# Altium PCB ST-Link V2 Dongle.PcbDoc
Units mm, origin at the board's own origin, x right, y up, seen from the top; angles counter-clockwise.
Board outline 29 x 35 mm, 2 copper layers (Top Layer, Bottom Layer); 3 components, 8 nets, 37 pads, 87 vias.
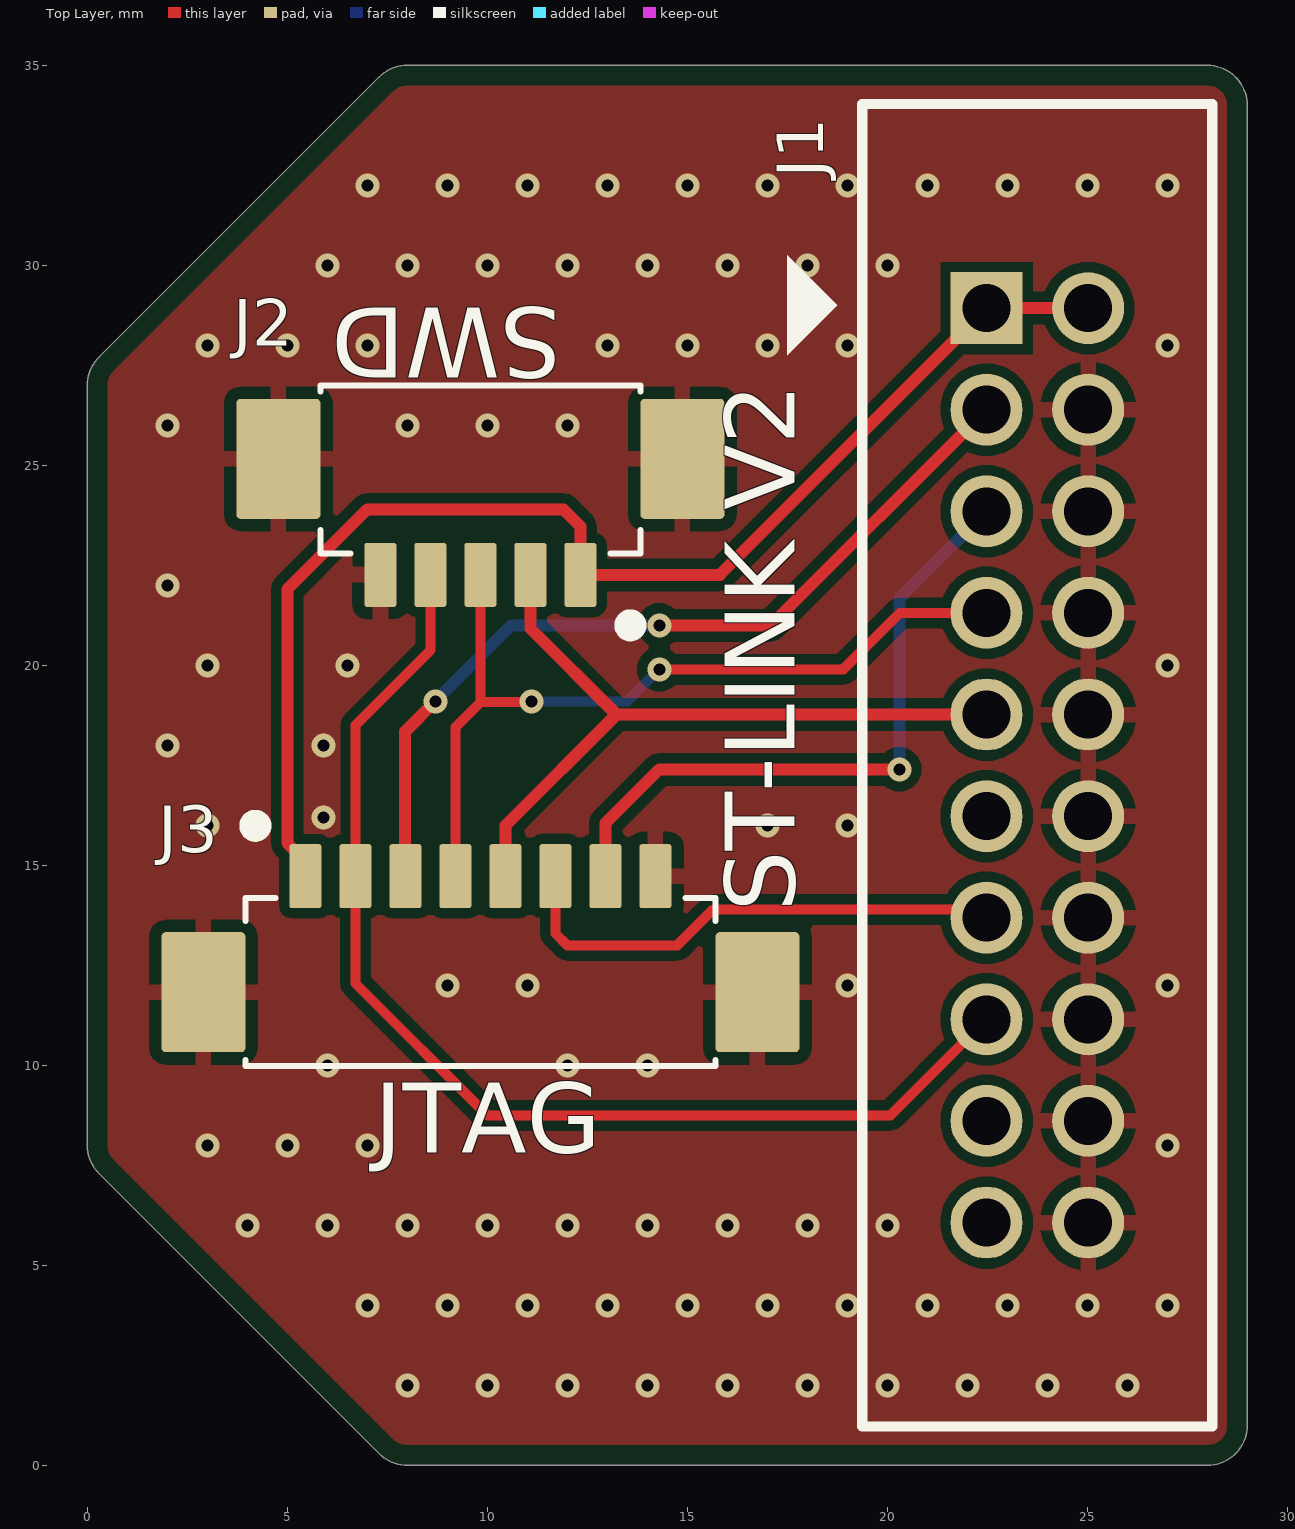
[diagram p0: Top Layer view]
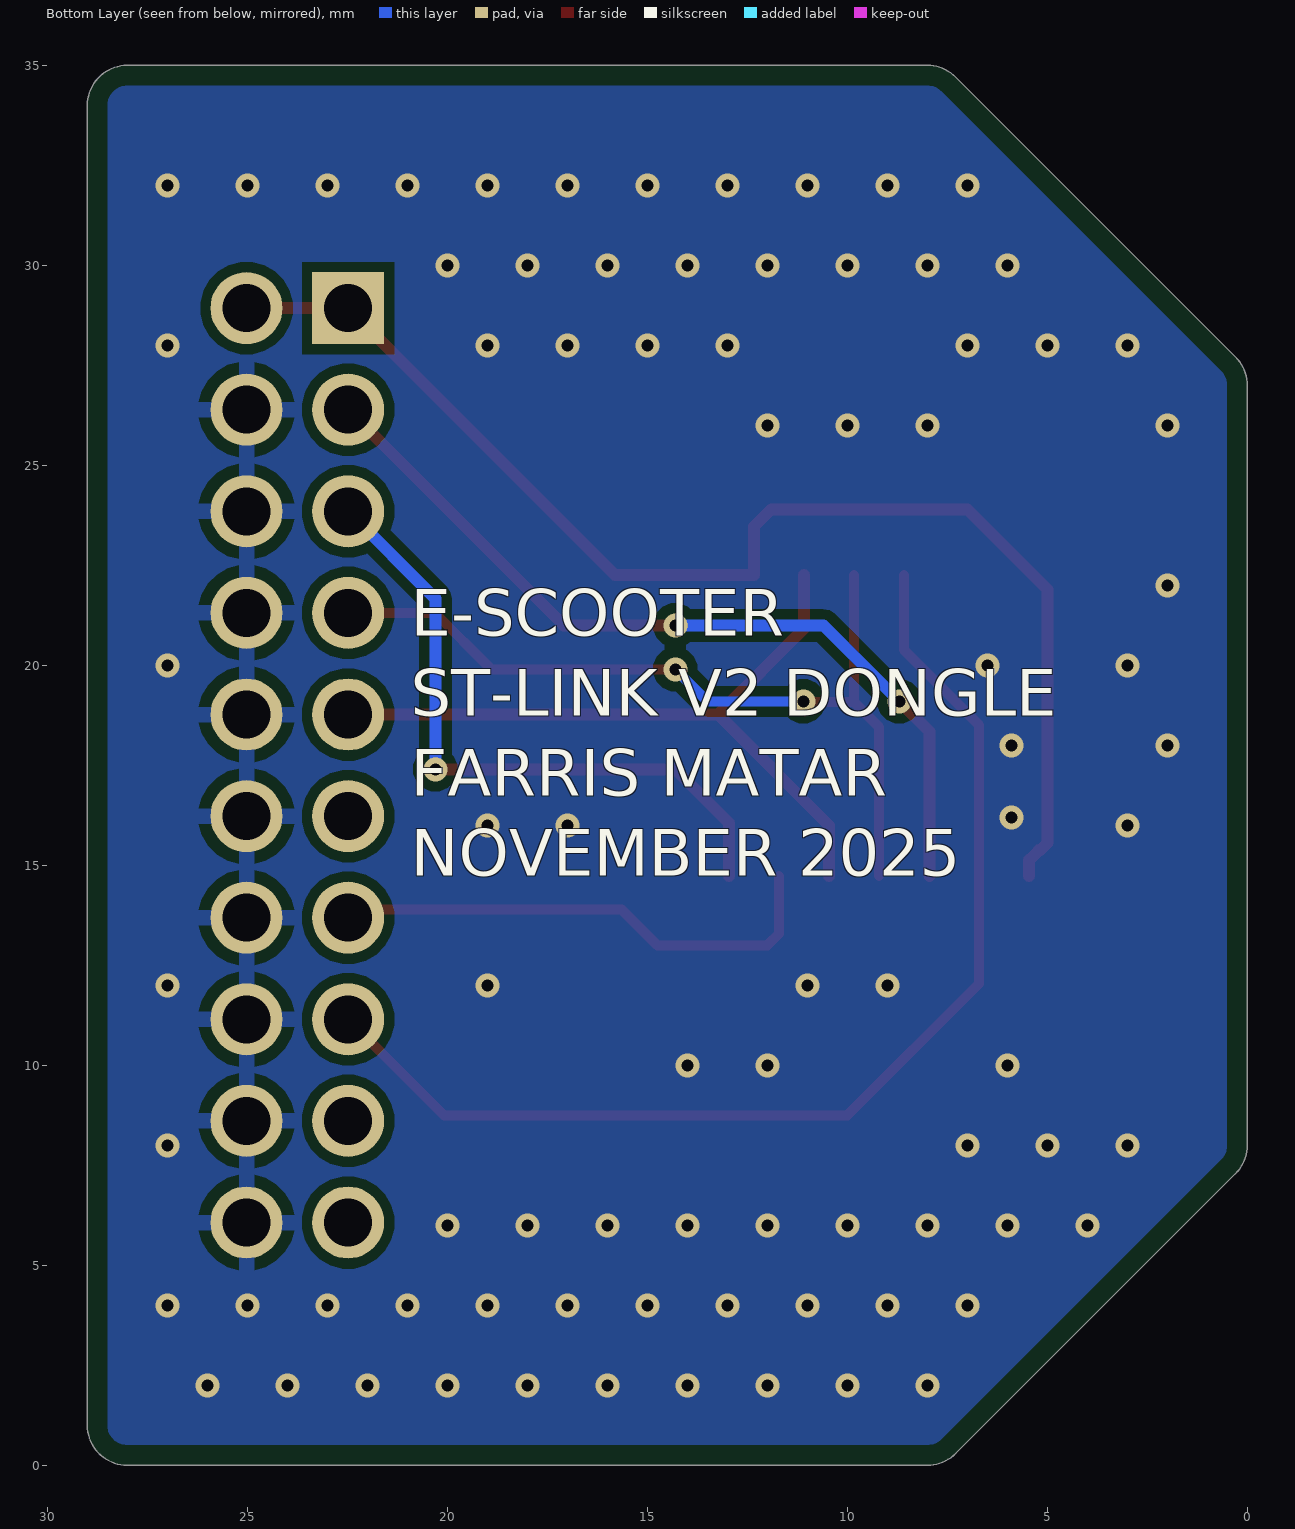
[diagram p1: Bottom Layer view, seen from below]
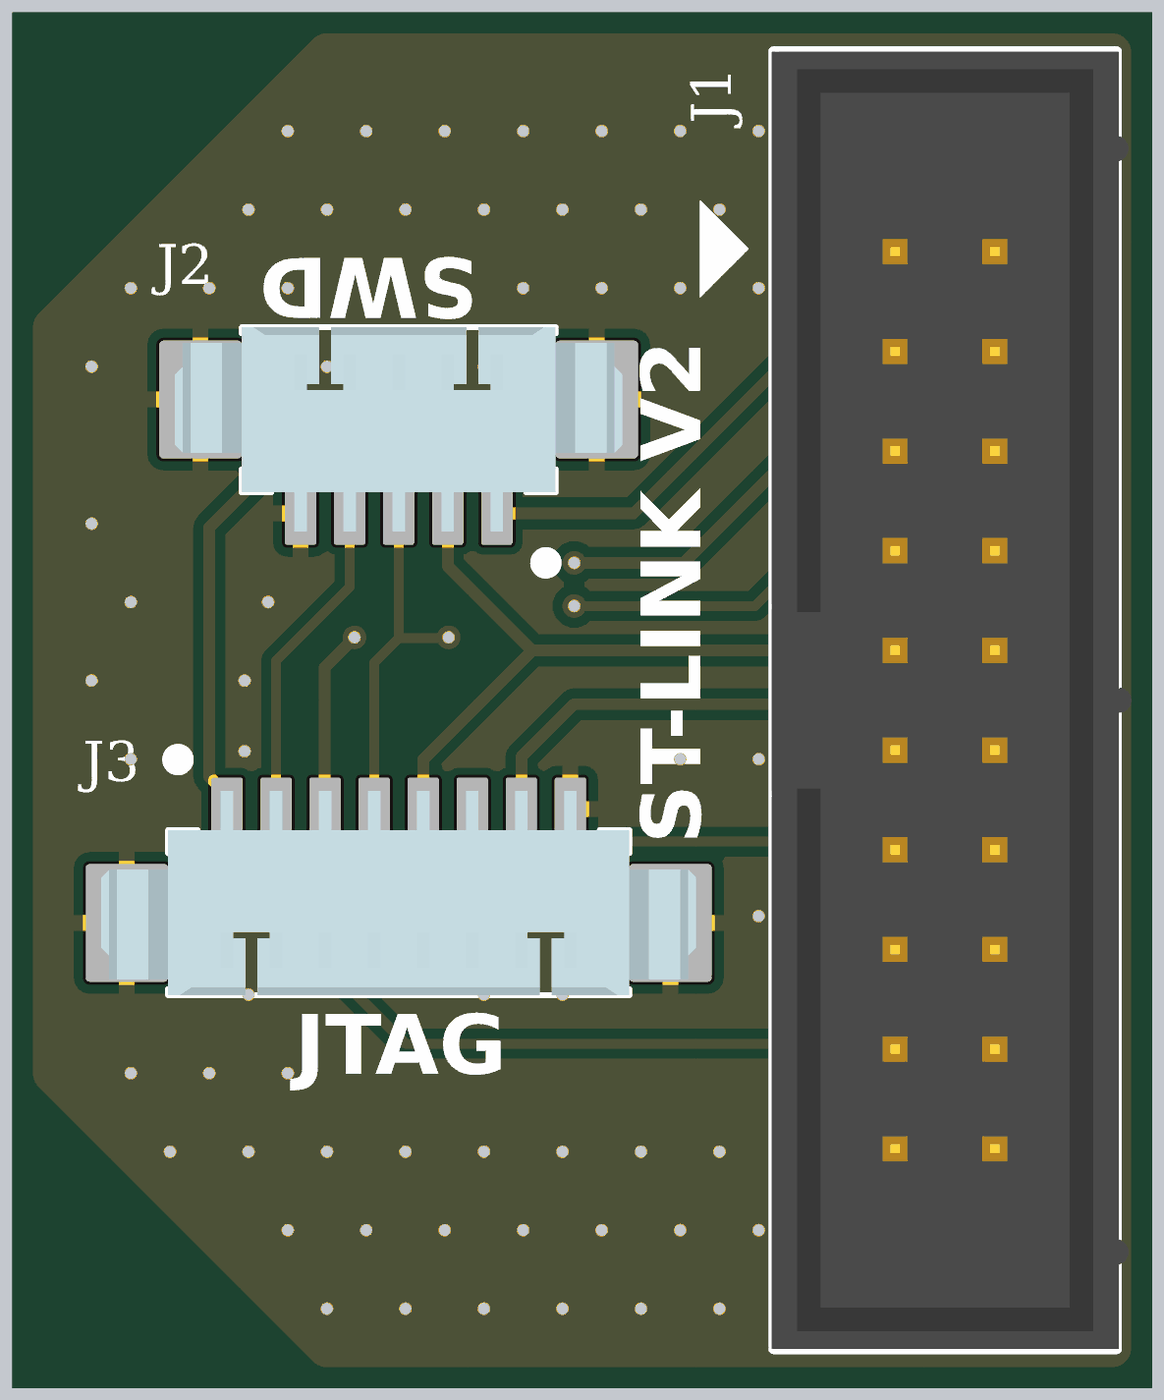
[diagram p2: 3D render of the assembled board from above, using the file's embedded part models]

## Layer stack, top to bottom
Top Solder: solder mask 0.0102, Solder Resist, Dk 3.5
Top Layer: signal copper 0.0356
Dielectric 1: dielectric 0.32, FR-4, Dk 4.8
Bottom Layer: signal copper 0.0356
Bottom Solder: solder mask 0.0102, Solder Resist, Dk 3.5

## Board outline
0.293,7.293 cw(c1,8) 0,8 0,27 cw(c1,27) 0.293,27.707 7.293,34.707 cw(c8,34) 8,35 28,35 cw(c28,34) 29,34 29,1 cw(c28,1) 28,0 8,0 cw(c8,1) 7.293,0.293

## Design rules (kind name [scope] priority, off if disabled: settings)
BoardOutlineClearance [All] p1: gap=1 ignorepadtopadclearanceinfootprint=FALSE except(0.5: Fill-OutlineEdge Fill-CavityEdge Fill-CutoutEdge Fill-SplitBarrior Fill-SplitContinuation Poly-OutlineEdge Poly-CavityEdge Poly-CutoutEdge Poly-SplitBarrior Poly-SplitContinuation Region-OutlineEdge Region-CavityEdge Region-CutoutEdge Region-SplitBarrior Region-SplitContinuation Text-OutlineEdge Text-CavityEdge Text-CutoutEdge Text-SplitBarrior Text-SplitContinuation)
Clearance [All] p1: gap=0.25 ignorepadtopadclearanceinfootprint=FALSE
ComponentClearance [All] p1: gap=0.127 collisioncheckmode=3 verticalgap=0.127 showdistances=TRUE
DiffPairsRouting [All] p1: maxlimit=0.254 minlimit=0.127 mostfreqgap=0.127 toplayer_minwidth=0.127 toplayer_maxwidth=25.4 toplayer_prefwidth=0.127 bottomlayer_minwidth=0.127 bottomlayer_maxwidth=25.4 bottomlayer_prefwidth=0.127 maxuncoupledlength=12.7
Height [All] p1: minheight=0 maxheight=1816.048 prefheight=12.7
HoleSize [All] p1: absolutevalues=TRUE maxlimit=6.3 minlimit=0.3 maxpercent=80.000 minpercent=20.000
HoleToHoleClearance [All] p1: gap=0.25 allowstackedmicrovias=FALSE
MinimumAnnularRing [All] p1: minimumring=0.076
MinimumSolderMaskSliver [All] p1: minsoldermaskwidth=0
PlaneClearance [All] p1: clearance=0.127
PlaneConnect PlaneConnectPowerPads [InPadClass('PowerPads')] p1: planeconnectstyle=Direct reliefexpansion=0.508 reliefentries=4 reliefconductorwidth=0.254 reliefairgap=0.254
PlaneConnect [All] p2: pad.planeconnectstyle=Relief pad.reliefexpansion=0.3 pad.reliefentries=4 pad.reliefconductorwidth=0.127 pad.reliefairgap=0.127 via.planeconnectstyle=Direct via.reliefexpansion=0.3 via.reliefentries=4 via.reliefconductorwidth=0.127 via.reliefairgap=0.127
PolygonConnect PolygonConnectPowerPads [All vs (InPadClass('PowerPads'))] p1: connectstyle=Direct reliefconductorwidth=0.254 reliefentries=4 polygonreliefangle="90 Angle" airgapwidth=0.254
PolygonConnect [All] p2: thpad.connectstyle=Relief thpad.reliefconductorwidth=0.4 thpad.reliefentries=4 thpad.polygonreliefangle="90 Angle" thpad.airgapwidth=0.3 smdpad.connectstyle=Relief smdpad.reliefconductorwidth=0.4 smdpad.reliefentries=4 smdpad.polygonreliefangle="90 Angle" smdpad.airgapwidth=0.3 via.connectstyle=Direct via.reliefconductorwidth=0.127 via.reliefentries=4 via.polygonreliefangle="90 Angle" via.airgapwidth=0.127
RoutingVias [All] p1: holewidth=0.3 width=0.6 viastyle="Through Hole" minholewidth=0.3 minwidth=0.6 maxholewidth=0.6 maxwidth=6.6
SilkToSilkClearance [All] p1: silktosilkclearance=0
SilkToSolderMaskClearance [IsPad] p1: minsilkscreentomaskgap=0.127 clearancetoexposedcopper=TRUE
SolderMaskExpansion [All] p1: expansion=0.075 istentingtop=FALSE
SupplyNets "Schematic Supply Nets_1" [InNet('3V3')] p1: voltage=0.000
SupplyNets "Schematic Supply Nets" [InNet('GND')] p2: voltage=0.000
Width [All] p1: maxlimit=25.4 minlimit=0.127 preferedwidth=0.127 minimp=50.000000 maximp=50.000000 favimp=50.000000
20 further rules are at their usual default settings.

## Components (designator, comment, footprint, x,y, rotation, side; value= is the part's Value field where it differs from the comment)
J1 "3020-20-0100-00" CNC_3020-20-0100-00 23.75,17.5 r90 top
J2 "CON_MOLEX-PICO_5POS_RA" MOLEX-532610571 9.827,24.5 r180 top
J3 "CON_MOLEX-PICO_8POS_RA" MOLEX-532610871 9.827,12.489 r0 top

## Footprints (in the part's own frame and the unit in brackets; to place one, negate y for a bottom-side part, rotate by r counter-clockwise, add the part's x,y. Pads: shape width x height; smd on the part's side, far side on the other; paste and mask are expansions set on the pad)
CNC_3020-20-0100-00 [mm]
  rect 1.8x1.8 hole 1.2: 1(11.43,1.27)
  round 1.8 hole 1.2: 2(11.43,-1.27) 3(8.89,1.27) 4(8.89,-1.27) 5(6.35,1.27) 6(6.35,-1.27) 7(3.81,1.27) 8(3.81,-1.27) 9(1.27,1.27) 10(1.27,-1.27) 11(-1.27,1.27) 12(-1.27,-1.27) 13(-3.81,1.27) 14(-3.81,-1.27) 15(-6.35,1.27) 16(-6.35,-1.27) 17(-8.89,1.27) 18(-8.89,-1.27) 19(-11.43,1.27) 20(-11.43,-1.27)
  silkscreen extent -16.53,-4.38 16.53,6.25, body extent -16.53,-4.75 16.53,4.43, height 8.82
MOLEX-532610571 [mm]
  rrect10% 2.1x3 smd: 0(-5.05,-0.661) 0(5.05,-0.661)
  rrect15% 0.8x1.6 smd: 1(-2.5,2.239) 2(-1.25,2.239) 3(0,2.239) 4(1.25,2.239) 5(2.5,2.239)
  silkscreen extent -4,-2.5 4,3.7, body extent -5.7,-2.5 5.7,2.7, height 3.4
MOLEX-532610871 [mm]
  rrect10% 2.1x3 smd: 0(-6.925,-0.661) 0(6.925,-0.661)
  rrect15% 0.8x1.6 smd: 1(-4.375,2.239) 2(-3.125,2.239) 3(-1.875,2.239) 4(-0.625,2.239) 5(0.625,2.239) 6(1.875,2.239) 7(3.125,2.239) 8(4.375,2.239)
  silkscreen extent -5.88,-2.5 5.88,3.7, body extent -7.57,-2.5 7.57,2.7, height 3.2

## Part data
J1: library part CON_10x2_HEADER, "CONN HEADER VERT 20POS 2.54MM", Manufacturer 1="CNC Tech", Supplier Part Number 1=1175-1612-ND, Manufacturer Part Number 1=3020-20-0100-00, Supplier 1=Digi-Key
J2: "CONN HEADER SMD R/A 5POS 1.25MM", Manufacturer 1=Molex, Manufacturer Part Number 1=0532610571, Supplier Part Number 1=WM7623CT-ND, Supplier 1=Digi-Key
J3: "CONN HEADER SMD R/A 8POS 1.25MM", Manufacturer 1=Molex, Manufacturer Part Number 1=0532610871, Supplier Part Number 1=WM7626CT-ND, Supplier 1=Digi-Key

## Via types
v1: diameter 0.6, hole 0.3, Top Layer to Bottom Layer, tented both sides, 87 vias

## Nets (pads, with @x,y where several pads share a name; then routed paths per layer and width w, separated by ;. In a path a pad name is that pad's centre, name@x,y a point inside that pad or via, vN(x,y) a via of type N, cw(c..) or ccw(c..) an arc to the next point about the centre after c; other vN are vias at no path point)
3V3: J1.1 J1.2 J2.1 J3.1 | length 32.4
  Top Layer w0.3: J3.1 5.452,15.128 5.202,15.378 5.176,15.378 5,15.554 5,21.9 7,23.9 11.9,23.9 12.327,23.473 J2.1 15.811,22.261 J1.1 J1.2
GND: J1.4 J1.6 J1.8 J1.10 J1.12 J1.14 J1.16 J1.18 J1.20 J2.0 J2.5 J3.0 J3.8
  other v1: 8,2 10,2 12,2 14,2 16,2 18,2 20,2 22,2 24,2 26,2 7,4 9,4 11,4 13,4 15,4 17,4 19,4 21,4 23,4 25,4 27,4 4,6 6,6 8,6 10,6 12,6 14,6 16,6 18,6 20,6 3,8 5,8 7,8 27,8 6,10 12,10 14,10 9,12 11,12 19,12 27,12 3,16 17,16 19,16 5.9,16.2 2,18 5.9,18 3,20 6.5,20 27,20 2,22 2,26 8,26 10,26 12,26 3,28 5,28 7,28 13,28 15,28 17,28 19,28 27,28 6,30 8,30 10,30 12,30 14,30 16,30 18,30 20,30 7,32 9,32 11,32 13,32 15,32 17,32 19,32 21,32 23,32 25,32 27,32
JTCK/SWCLK: J1.9 J2.2 J3.5 | length 18.8
  Top Layer w0.3: J3.5 10.452,15.992 13.23,18.77 ; J2.2 11.077,20.923 13.23,18.77 ; J1.9 13.23,18.77
JTDI: J1.5 J3.7 | length 16.6
  Top Layer w0.3: J3.7 12.952,16.052 14.3,17.4 v1(20.3,17.4)
  Bottom Layer w0.3: v1(20.3,17.4) 20.3,21.67 J1.5
JTDO: J1.13 J3.6 | length 12.8
  Top Layer w0.25: J3.6 11.702,13.298 12,13 14.75,13 15.65,13.9 22.27,13.9 J1.13
JTMS/SWDIO: J1.7 J2.3 J3.4 | length 21.4
  Top Layer w0.25: J3.4 9.202,18.452 9.827,19.077 ; J2.3 9.827,19.077 ; v1(11.1,19.1) 11.077,19.077 9.827,19.077 ; v1(14.3,19.9) 18.9,19.9 20.31,21.31 J1.7
  Bottom Layer w0.25: v1(11.1,19.1) 13.5,19.1 v1(14.3,19.9)
JTRST: J1.3 J3.3 | length 21.5
  Top Layer w0.3: J3.3@7.941,14.739 7.941,18.341 v1(8.7,19.1) ; v1(14.3,21) 17.09,21 J1.3
  Bottom Layer w0.3: v1(8.7,19.1) 10.6,21 v1(14.3,21)
NRST: J1.15 J2.4 J3.2 | length 29.1
  Top Layer w0.25: J2.4 8.577,20.377 6.702,18.502 J3.2 6.702,12.048 10,8.75 20.08,8.75 J1.15
pads on no net: J1.11 J1.17 J1.19

## Polygon pours and split planes (outlines as drawn)
GND on Top Layer "GND_L01_P000" (solid, remove dead copper, pour order 0): 0.293,7.293 cw(c1,8) 0,8 0,27 cw(c1,27) 0.293,27.707 7.293,34.707 cw(c8,34) 8,35 28,35 cw(c28,34) 29,34 29,1 cw(c28,1) 28,0 8,0 cw(c8,1) 7.293,0.293
GND on Bottom Layer "GND_L02_P001" (solid, pour order 1): 0.293,7.293 cw(c1,8) 0,8 0,27 cw(c1,27) 0.293,27.707 7.293,34.707 cw(c8,34) 8,35 28,35 cw(c28,34) 29,34 29,1 cw(c28,1) 28,0 8,0 cw(c8,1) 7.293,0.293

## Silkscreen, mask and mechanical layers (free items; w line width, h text height)
Top Overlay:
  text "SWD" at 11.844,29.516 h3 r180
  text "ST-LINK V2" at 18.266,13.843 h3 r90
  text "JTAG" at 7.177,7.234 h3
Bottom Overlay:
  text "E-SCOOTER / ST-LINK V2 DONGLE / FARRIS MATAR / NOVEMBER 2025" at 20.918,14.351 h2
Mechanical 1:
  lines w0.25: 0.293,7.293 cw(c1,8) 0,8 0,27 cw(c1,27) 0.293,27.707 7.293,34.707 cw(c8,34) 8,35 28,35 cw(c28,34) 29,34 29,1 cw(c28,1) 28,0 8,0 cw(c8,1) 7.293,0.293 0.293,7.293 ; 0.293,7.293 0.293,7.293